# Altium PCB Epoxy.PcbDoc
Units mil, origin at the board's own origin, x right, y up, seen from the top; angles counter-clockwise.
Board outline 6000 x 4000 mil, 2 copper layers (Top Layer, Bottom Layer); 91 components, 74 nets, 328 pads, 6 vias.
Unrouted connection lines stored in the file: 208.
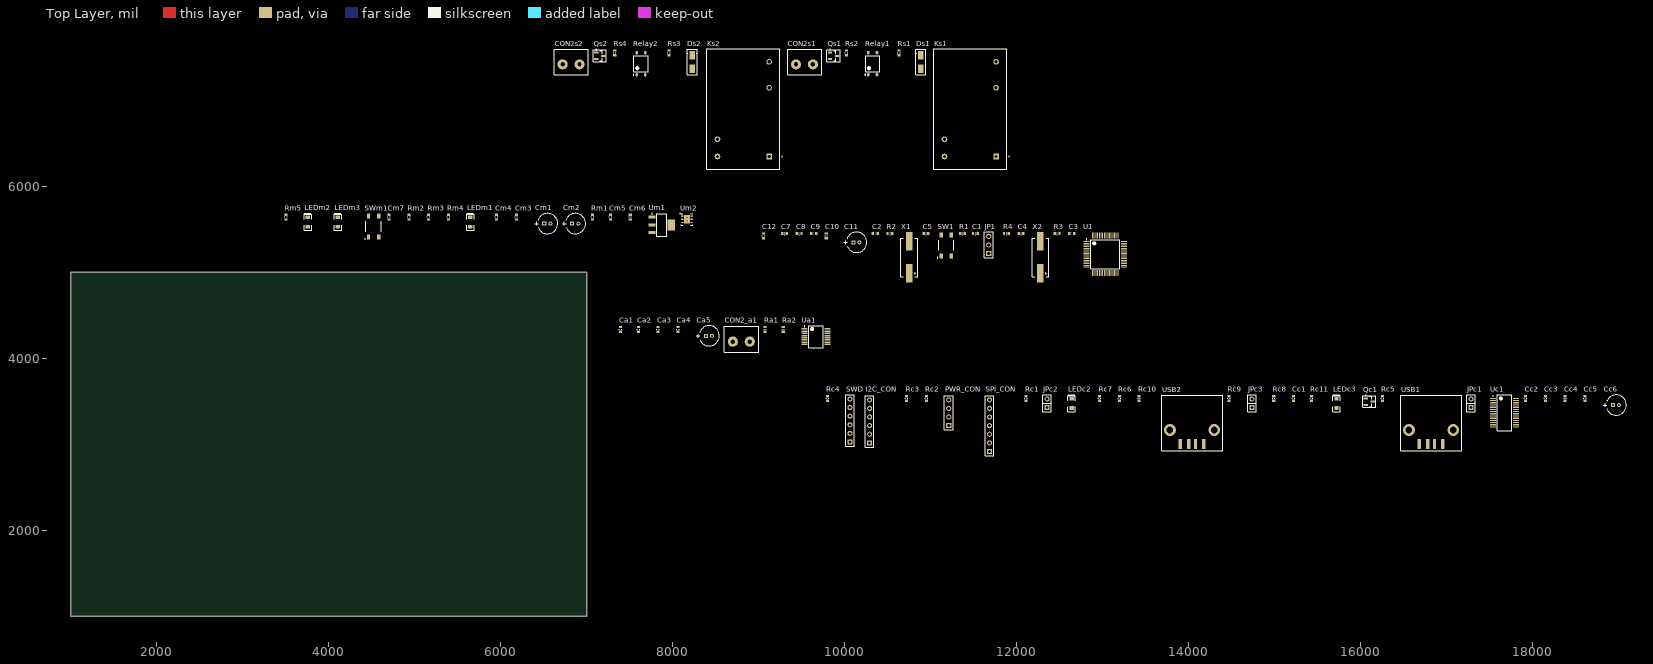
[diagram p0: Top Layer view]
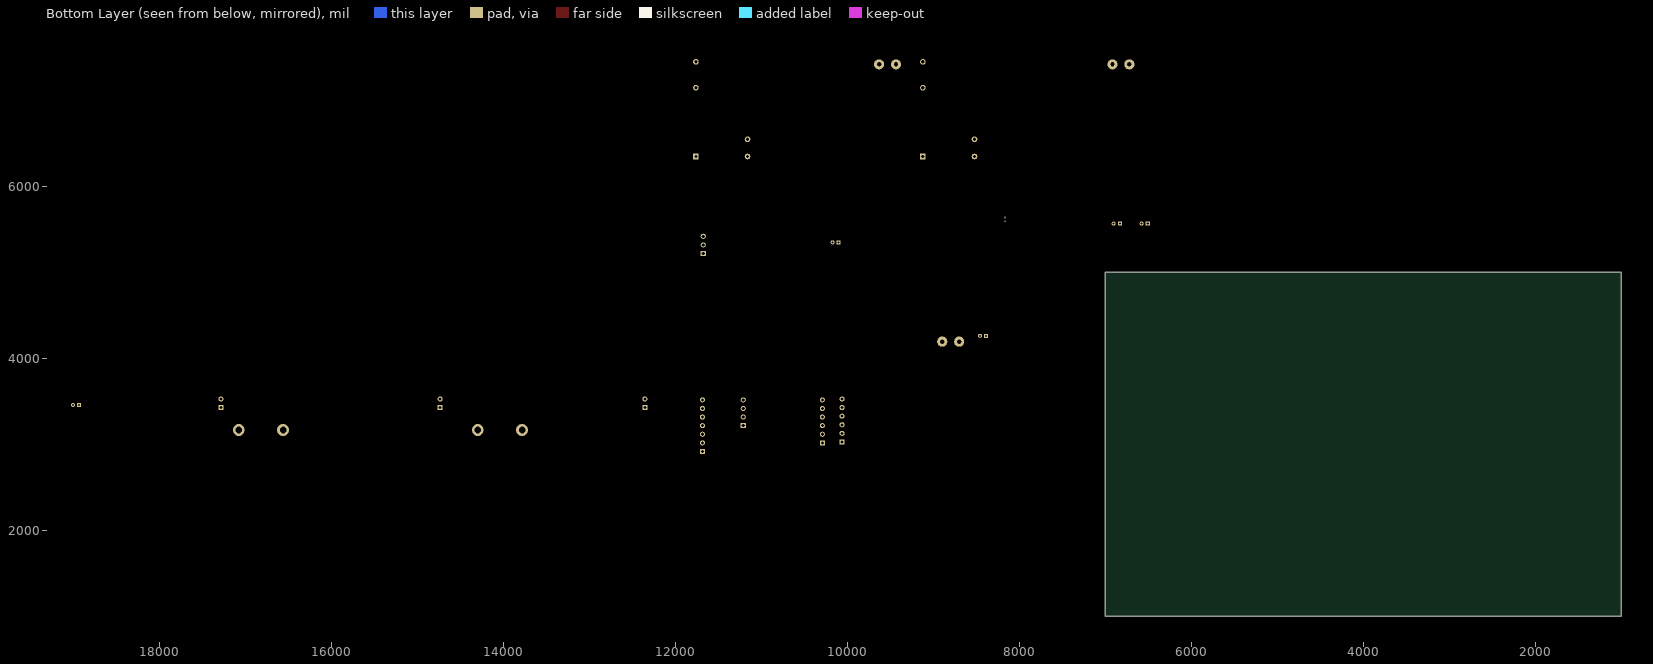
[diagram p1: Bottom Layer view, seen from below]

## Layer stack, top to bottom
Top Solder: solder mask 0.4, Solder Resist, Dk 3.5
Top Layer: signal copper 1.4
Dielectric 1: dielectric 12.6, FR-4, Dk 4.8
Bottom Layer: signal copper 1.4
Bottom Solder: solder mask 0.4, Solder Resist, Dk 3.5

## Board outline
1000,1000 7000,1000 7000,5000 1000,5000

## Design rules (kind name [scope] priority, off if disabled: settings)
Clearance [All] p1: gap=10 ignorepadtopadclearanceinfootprint=FALSE except(0: Arc-Hole Track-Hole SMDPad-Hole THPad-Hole Via-Hole Fill-Hole Poly-Hole Region-Hole Text-Hole)
PolygonConnect [All] p1: connectstyle=Relief reliefconductorwidth=10 reliefentries=4 polygonreliefangle="90 Angle" airgapwidth=10
RoomDefinition Scanners [InComponentClass('Scanners')] p1: confinementstyle=ConfineIn formatcopy=TRUE lockcomponents=FALSE outline 6605,6187.95 11930,6187.95 11930,7707.95 6605,7707.95
RoomDefinition Misc [InComponentClass('Misc')] p2: confinementstyle=ConfineIn formatcopy=TRUE lockcomponents=FALSE outline 3470,5367.56 8265,5367.56 8265,5797.56 3470,5797.56
RoomDefinition MCU [InComponentClass('MCU')] p3: confinementstyle=ConfineIn formatcopy=TRUE lockcomponents=FALSE outline 9025,4870 13300,4870 13300,5580 9025,5580
RoomDefinition Connectors [InComponentClass('Connectors')] p4: confinementstyle=ConfineIn formatcopy=TRUE lockcomponents=FALSE outline 9770,2857.56 19105,2857.56 19105,3687.56 9770,3687.56
RoomDefinition Analiser [InComponentClass('Analiser')] p5: confinementstyle=ConfineIn formatcopy=TRUE lockcomponents=FALSE outline 7360,4062.56 9845,4062.56 9845,4492.56 7360,4492.56
RoutingVias [All] p1: holewidth=28 width=50 viastyle="Through Hole" minholewidth=28 minwidth=50 maxholewidth=28 maxwidth=50
SolderMaskExpansion [All] p1: expansion=4
Width [All] p1: maxlimit=10 minlimit=10 preferedwidth=10
30 further rules are at their usual default settings.

## Classes and differential pairs
component class Scanners: CON2s1 CON2s2 Ds1 Ds2 Ks1 Ks2 Qs1 Qs2 Relay1 Relay2 Rs1 Rs2 Rs3 Rs4
component class Misc: Cm1 Cm2 Cm3 Cm4 Cm5 Cm6 Cm7 Dm1 LEDm1 LEDm2 LEDm3 Rm1 Rm2 Rm3 Rm4 Rm5 SWm1 Um1 Um2
component class MCU: C1 C2 C3 C4 C5 C7 C8 C9 C10 C11 C12 JP1 R1 R2 R3 R4 SW1 U1 X1 X2
component class Connectors: Cc1 Cc2 Cc3 Cc4 Cc5 Cc6 I2C_CON JPc1 JPc2 JPc3 LEDc2 LEDc3 PWR_CON Qc1 Rc1 Rc2 Rc3 Rc4 Rc5 Rc6 Rc7 Rc8 Rc9 Rc10 Rc11 SPI_CON SWD Uc1 USB1 USB2
component class Analiser: Ca1 Ca2 Ca3 Ca4 Ca5 CON2_a1 Ra1 Ra2 Ua1

## Components (designator, comment, footprint, x,y, rotation, side; value= is the part's Value field where it differs from the comment)
C1 "20p" CAPC0603(1608)100_L 11520,5450 r0 top
C2 "20p" CAPC0603(1608)100_L 10355,5450 r0 top
C3 "20p" CAPC0603(1608)100_L 12640,5450 r0 top
C4 "20p" CAPC0603(1608)100_L 12050,5450 r0 top
C5 "100n" CAPC0603(1608)100_L 10945,5450 r0 top
C7 "100n" CAPC0603(1608)100_L 9300,5450 r0 top
C8 "100n" CAPC0603(1608)100_L 9470,5450 r0 top
C9 "100n" CAPC0603(1608)100_L 9640,5450 r0 top
C10 "100n" CAPC0603(1608)100_L 9785,5425 r90 top
C11 "1uF" Cap_THT_5x11 10100,5350 r0 top
C12 "100n" CAPC0603(1608)100_L 9055,5425 r90 top
Ca1 "100n" CAPC0603(1608)100_L 7390,4337.56 r90 top
Ca2 "100n" CAPC0603(1608)100_L 7600,4337.56 r90 top
Ca3 "100n" CAPC0603(1608)100_L 7830,4337.56 r90 top
Ca4 "100n" CAPC0603(1608)100_L 8060,4337.56 r90 top
Ca5 "1uF" Cap_THT_5x11 8385,4262.56 r0 top
Cc1 "100n" CAPC0603(1608)100_L 15220,3532.56 r90 top
Cc2 "100n" CAPC0603(1608)100_L 17920,3532.56 r90 top
Cc3 "100n" CAPC0603(1608)100_L 18150,3532.56 r90 top
Cc4 "100n" CAPC0603(1608)100_L 18380,3532.56 r90 top
Cc5 "100n" CAPC0603(1608)100_L 18610,3532.56 r90 top
Cc6 "1uF" Cap_THT_5x11 18935,3457.56 r0 top
Cm1 "10uF" Cap_THT_5x11 6505,5567.56 r0 top
Cm2 "10uF" Cap_THT_5x11 6830,5567.56 r0 top
Cm3 "1uF" CAPC0603(1608)100_L 6180,5642.56 r90 top
Cm4 "100n" CAPC0603(1608)100_L 5950,5642.56 r90 top
Cm5 "1uF" CAPC0603(1608)100_L 7275,5642.56 r90 top
Cm6 "100n" CAPC0603(1608)100_L 7505,5642.56 r90 top
Cm7 "100n" CAPC0603(1608)100_L 4700,5642.56 r90 top
CON2_a1 "ARK2" ARK2 8600,4072.56 r0 top
CON2s1 "ARK2" ARK2 9335,7297.95 r0 top
CON2s2 "ARK2" ARK2 6620,7297.95 r0 top
Ds1 "D Schottky" SMA 10885,7447.95 r90 top
Ds2 "D Schottky" SMA 8225,7447.95 r90 top
I2C_CON "HDR1X6" HDR1X6 10290,3017.56 r90 top
JP1 "HDR1X3" HDR1X3 11675,5220 r90 top
JPc1 "Jumper" "HDR1X2 - JP" 17235,3477.56 r90 top
JPc2 "Jumper" "HDR1X2 - JP" 12305,3477.56 r90 top
JPc3 "Jumper" "HDR1X2 - JP" 14685,3477.56 r90 top
Ks1 "Relay-SPDT" MODULE5B 11460,6897.95 r90 top
Ks2 "Relay-SPDT" MODULE5B 8820,6897.95 r90 top
LEDc2 "RED" 0805_DIODE 12640,3417.56 r90 top
LEDc3 "RED" 0805_DIODE 15720,3417.56 r90 top
LEDm1 "RED" 0805_DIODE 5645,5527.56 r90 top
LEDm2 "RED" 0805_DIODE 3755,5527.56 r90 top
LEDm3 "RED" 0805_DIODE 4105,5527.56 r90 top
PWR_CON "HDR1X4" HDR1X4 11210,3217.56 r90 top
Qc1 "BC817-25" SOT23_N 16100,3497.56 r0 top
Qs1 "BC817-25" SOT23_N 9870,7517.95 r0 top
Qs2 "BC817-25" SOT23_N 7150,7517.95 r0 top
R1 "0R" RESC0603(1608)_L 11370,5450 r0 top
R2 "0R" RESC0603(1608)_L 10525,5450 r0 top
R3 "0R" RESC0603(1608)_L 12470,5450 r0 top
R4 "0R" RESC0603(1608)_L 11880,5450 r0 top
Ra1 "2k" RESC0603(1608)_L 9075,4337.56 r90 top
Ra2 "0k" RESC0603(1608)_L 9285,4337.56 r90 top
Rc1 "0R" RESC0603(1608)_L 12110,3532.56 r90 top value=0
Rc2 "0R" RESC0603(1608)_L 10950,3532.56 r90 top
Rc3 "0R" RESC0603(1608)_L 10720,3532.56 r90 top
Rc4 "0R" RESC0603(1608)_L 9800,3532.56 r90 top
Rc5 "10k" RESC0603(1608)_L 16255,3532.56 r90 top
Rc6 "22R" RESC0603(1608)_L 13195,3532.56 r90 top
Rc7 "22R" RESC0603(1608)_L 12965,3532.56 r90 top
Rc8 "1k5" RESC0603(1608)_L 14990,3532.56 r90 top
Rc9 "10k" RESC0603(1608)_L 14470,3532.56 r90 top
Rc10 "3k3" RESC0603(1608)_L 13425,3532.56 r90 top
Rc11 "3.3k" RESC0603(1608)_L 15430,3532.56 r90 top
Relay1 "FODM121R2" "FAIR-MFP 4L_V" 10325,7427.95 r90 top
Relay2 "FODM121R2" "FAIR-MFP 4L_V" 7630,7427.95 r90 top
Rm1 "3k3" RESC0603(1608)_L 7065,5642.56 r90 top
Rm2 "3k3" RESC0603(1608)_L 4930,5642.56 r90 top
Rm3 "3k3" RESC0603(1608)_L 5160,5642.56 r90 top
Rm4 "4k7" RESC0603(1608)_L 5390,5642.56 r90 top
Rm5 "100R" RESC0603(1608)_L 3500,5642.56 r90 top
Rs1 "RES0603" RESC0603(1608)_L 10630,7552.95 r90 top
Rs2 "RES0603" RESC0603(1608)_L 10020,7552.95 r90 top
Rs3 "RES0603" RESC0603(1608)_L 7955,7552.95 r90 top
Rs4 "RES0603" RESC0603(1608)_L 7325,7552.95 r90 top
SPI_CON "HDR1X7" HDR1X7 11685,2917.56 r90 top
SW1 "TVCM01-038B" JNFU-TVCM01-038B_V 11180,5315 r90 top
SWD "HDR1X6" HDR1X6 10060,3027.56 r90 top
SWm1 "TVCM01-038B" JNFU-TVCM01-038B_V 4520,5532.56 r90 top
U1 "STM32F103RBT6TR" LQFP64_N 13030,5210 r0 top
Ua1 "AD5933YRSZ" ADI-RS-16_L 9665,4252.56 r0 top
Uc1 "FT232RL-Reel" SSOP-28_L 17675,3367.56 r0 top
Um1 "LD1117S50TR" SOT-223_L 7870,5552.56 r0 top
Um2 "LD39050PU33R" DFN6D_L 8165,5617.56 r0 top
USB1 "USB_A" USB_A_SMT 16820,3002.56 r0 top
USB2 "USB_A" USB_A_SMT 14040,3002.56 r0 top
X1 "8MHz" HC49/4H_SMX 10750,5175 r90 top
X2 "8MHz" HC49/4H_SMX 12275,5175 r90 top

## Footprints (in the part's own frame and the unit in brackets; to place one, negate y for a bottom-side part, rotate by r counter-clockwise, add the part's x,y. Pads: shape width x height; smd on the part's side, far side on the other; paste and mask are expansions set on the pad)
0805_DIODE [mm]
  rect 1.05x1.3 smd: 1(0.127,0) 2(2.858,0)
  silkscreen extent -0.98,-1.12 4.09,1.12, body extent 0.41,-0.64 2.43,0.64, height 0.81
ADI-RS-16_L [mm] "SOP, 16-Leads, Body 6.2x5.3mm, Pitch 0.65mm, IPC High Density"
  oval 1.8x0.45 smd: 1(-3.4,2.275) 2(-3.4,1.625) 3(-3.4,0.975) 4(-3.4,0.325) 5(-3.4,-0.325) 6(-3.4,-0.975) 7(-3.4,-1.625) 8(-3.4,-2.275) 9(3.4,-2.275) 10(3.4,-1.625) 11(3.4,-0.975) 12(3.4,-0.325) 13(3.4,0.325) 14(3.4,0.975) 15(3.4,1.625) 16(3.4,2.275)
  silkscreen extent -3.52,-3.25 2.1,3.25, body extent -2.8,-3.25 2.8,3.25, height 2
ARK2 [mm]
  round 3 hole 1.3: 1(2.5,3.1) 2(7.5,3.1)
  silkscreen extent 0,0 10.1,7.6, body extent 0,0 10,7.6, height 10
Cap_THT_5x11 [mm] "Cap_THT_5x11"
  rect 1.2x1.2 hole 0.6: 1(0,0)
  round 1.2 hole 0.6: 2(1.8,0)
  silkscreen extent -2.79,-3 3.97,3, body extent -1.59,-2.49 3.4,2.5, height 11.5
CAPC0603(1608)100_L [mm]
  rect 0.7x0.9 smd: 1(-0.7,0) 2(0.7,0)
  silkscreen extent -0.05,-0.35 0.05,0.35, body extent -0.87,-0.47 0.88,0.48, height 1
DFN6D_L [mm] "SON, 6-Leads, Body 3x3mm, Pitch 0.95mm, Thermal Pad 2.4x1.65mm, IPC High Density"
  oval 0.7x0.4 smd: 1(-1.425,0.95) 2(-1.425,0) 3(-1.425,-0.95) 4(1.425,-0.95) 5(1.425,0) 6(1.425,0.95)
  rect 1.65x2.4 smd: 7(0,0)
  silkscreen extent -2.15,-1.7 1.7,1.75, body extent -1.55,-1.55 1.55,1.55, height 0.95
"FAIR-MFP 4L_V" [mm] "SOP, 4-Leads, Body 4.2x4.6mm, Pitch 2.54mm"
  oval 1x0.8 smd: 1(-3.25,1.27) 2(-3.25,-1.27) 3(3.25,-1.27) 4(3.25,1.27)
  silkscreen extent -3.37,-2.1 2.35,2.34, body extent -3.39,-1.92 3.39,1.93, height 2.4
HC49/4H_SMX [mm]
  rect 5.5x2 smd: 1(-4.75,0) 2(4.75,0)
  silkscreen extent -5.7,-2.45 5.7,2.45, body extent -6.3,-2.3 6.2,2.35, height 3.9
"HDR1X2 - JP" [mm] "Connector; Header; 2 Position, Jumper"
  rect 1.5x1.5 hole 0.9: 1(-1.27,-1.27)
  round 1.5 hole 0.9: 2(1.27,-1.27)
  silkscreen extent -2.54,-2.54 2.54,0, body extent -2.54,-2.51 2.54,0.03, height 8.54
HDR1X3 [mm] "Connector; Header; 3 Position"
  rect 1.5x1.5 hole 0.9: 1(0,0)
  round 1.5 hole 0.9: 2(2.54,0) 3(5.08,0)
  silkscreen extent -1.27,-1.27 6.35,1.27, body extent -1.27,-1.24 6.35,1.3, height 8.54
HDR1X4 [mm] "Connector; Header; 4 Position"
  rect 1.5x1.5 hole 0.9: 1(0,0)
  round 1.5 hole 0.9: 2(2.54,0) 3(5.08,0) 4(7.62,0)
  silkscreen extent -1.27,-1.27 8.89,1.27, body extent -1.27,-1.27 8.89,1.27, height 8.54
HDR1X6 [mm] "Connector; Header; 6 Position"
  rect 1.5x1.5 hole 0.9: 1(0,0)
  round 1.5 hole 0.9: 2(2.54,0) 3(5.08,0) 4(7.62,0) 5(10.16,0) 6(12.7,0)
  silkscreen extent -1.27,-1.27 13.97,1.27, body extent -1.27,-1.27 13.97,1.27, height 8.54
HDR1X7 [mm] "Connector; Header; 7 Position"
  rect 1.5x1.5 hole 0.9: 1(0,0)
  round 1.5 hole 0.9: 2(2.54,0) 3(5.08,0) 4(7.62,0) 5(10.16,0) 6(12.7,0) 7(15.24,0)
  silkscreen extent -1.27,-1.27 16.51,1.27, body extent -1.27,-1.24 16.51,1.3, height 8.54
JNFU-TVCM01-038B_V [mm] "Surface Mount Switch, 4.5 x 4.5 mm Body"
  rect 1.5x1 smd: 1(-3.1,1.5) 2(3.1,1.5) 3(-3.1,-1.5) 4(3.1,-1.5)
  silkscreen extent -3.77,-2.25 1.52,2.67, body extent -2.25,-2.25 2.25,2.25, height 3.8
LQFP64_N [mm] "Thin QFP, 64-Leads, Body 10x10mm, Pitch 0.5mm, IPC Medium Density"
  oval 1.8x0.3 smd: 1(-5.55,3.75) 2(-5.55,3.25) 3(-5.55,2.75) 4(-5.55,2.25) 5(-5.55,1.75) 6(-5.55,1.25) 7(-5.55,0.75) 8(-5.55,0.25) 9(-5.55,-0.25) 10(-5.55,-0.75) 11(-5.55,-1.25) 12(-5.55,-1.75) 13(-5.55,-2.25) 14(-5.55,-2.75) 15(-5.55,-3.25) 16(-5.55,-3.75) 33(5.55,-3.75) 34(5.55,-3.25) 35(5.55,-2.75) 36(5.55,-2.25) 37(5.55,-1.75) 38(5.55,-1.25) 39(5.55,-0.75) 40(5.55,-0.25) 41(5.55,0.25) 42(5.55,0.75) 43(5.55,1.25) 44(5.55,1.75) 45(5.55,2.25) 46(5.55,2.75) 47(5.55,3.25) 48(5.55,3.75)
  oval 0.3x1.8 smd: 17(-3.75,-5.55) 18(-3.25,-5.55) 19(-2.75,-5.55) 20(-2.25,-5.55) 21(-1.75,-5.55) 22(-1.25,-5.55) 23(-0.75,-5.55) 24(-0.25,-5.55) 25(0.25,-5.55) 26(0.75,-5.55) 27(1.25,-5.55) 28(1.75,-5.55) 29(2.25,-5.55) 30(2.75,-5.55) 31(3.25,-5.55) 32(3.75,-5.55) 49(3.75,5.55) 50(3.25,5.55) 51(2.75,5.55) 52(2.25,5.55) 53(1.75,5.55) 54(1.25,5.55) 55(0.75,5.55) 56(0.25,5.55) 57(-0.25,5.55) 58(-0.75,5.55) 59(-1.25,5.55) 60(-1.75,5.55) 61(-2.25,5.55) 62(-2.75,5.55) 63(-3.25,5.55) 64(-3.75,5.55)
  silkscreen extent -5.67,-4.25 4.25,4.57, body extent -5,-5 5,5, height 1.6
MODULE5B [mm] "DIP; 5 Round Pins; Row Space 15.24 mm; Pitch 2.54 mm"
  rect 1.65x1.65 hole 1: 1(-13.97,-7.62)
  round 1.65 hole 1: 2(-13.97,7.62) 3(-8.89,7.62) 4(13.97,-7.62) 5(6.35,-7.62)
  silkscreen extent -17.8,-11.58 17.8,10.8, body extent -17.8,-10.8 17.8,10.8, height 14
RESC0603(1608)_L [mm]
  rect 0.7x0.9 smd: 1(-0.7,0) 2(0.7,0)
  silkscreen extent -0.05,-0.35 0.05,0.35, body extent -0.85,-0.47 0.85,0.47, height 0.6
SMA [mm] "Molded Diode, 2-Leads, Body 4,3x2,7mm, IPC Medium Density"
  rect 2.5x1.7 smd: 1(-2,0) 2(2,0)
  silkscreen extent -3.75,-1.5 3.75,1.5, body extent -2.6,-1.4 2.6,1.4, height 2.21
SOT23_N [mm]
  rect 1.3x0.6 smd: 1(-1.05,0.95) 2(-1.05,-0.95) 3(1.05,0)
  silkscreen extent -1.95,-1.75 1.95,1.92, body extent -1.6,-1.5 1.6,1.5, height 1.1
SOT-223_L [mm] "SOT223, 4-Leads, Body 6.5x3.5mm, Pitch 2.3mm, Lead Span 7mm, IPC High Density"
  rect 2.1x0.9 smd: 1(-2.85,2.3) 2(-2.85,0) 3(-2.85,-2.3)
  rect 2.1x3.2 smd: 4(2.85,0)
  silkscreen extent -2.97,-3.35 1.5,3.42, body extent -1.85,-3.35 1.85,3.35, height 1.8
SSOP-28_L [mm] "SOP, 28-Leads, Body 10.2x5.3mm, Pitch 0.65mm, IPC High Density"
  oval 1.8x0.35 smd: 1(-3.4,4.225) 2(-3.4,3.575) 3(-3.4,2.925) 4(-3.4,2.275) 5(-3.4,1.625) 6(-3.4,0.975) 7(-3.4,0.325) 8(-3.4,-0.325) 9(-3.4,-0.975) 10(-3.4,-1.625) 11(-3.4,-2.275) 12(-3.4,-2.925) 13(-3.4,-3.575) 14(-3.4,-4.225) 15(3.4,-4.225) 16(3.4,-3.575) 17(3.4,-2.925) 18(3.4,-2.275) 19(3.4,-1.625) 20(3.4,-0.975) 21(3.4,-0.325) 22(3.4,0.325) 23(3.4,0.975) 24(3.4,1.625) 25(3.4,2.275) 26(3.4,2.925) 27(3.4,3.575) 28(3.4,4.225)
  silkscreen extent -3.52,-5.25 2.1,5.25, body extent -2.8,-5.25 2.8,5.25, height 2
USB_A_SMT [mm]
  rect 1x3 smd: 1(3.5,0) 2(1,0) 3(-1,0) 4(-3.5,0)
  silkscreen extent -9,-2 9,14.5, body extent -8.67,-1.75 8.67,14.25, height 6.81

## Part data
C1 C2 C3 C4 C5 C7 C8 C9 C10 C12 Ca1 Ca2 Ca3 Ca4 Cc1 Cc2 Cc3 Cc4 Cc5 Cm3 Cm4 Cm5 Cm6 Cm7: library part CMP-1590-00005-1, "0603 (1608 Metric) Chip Capacitor", Case-EIA=0603, Case-Metric=1608, PackageReference=CAPC0603(1608)100
C11 Ca5 Cc6 Cm1 Cm2: library part Cap_Pol, "Polar capacitor"
CON2_a1 CON2s1 CON2s2: "Z彻cze 渞ubowe 2 piny"
Ds1 Ds2: "Schottky Diode", Code_JEDEC=DO-214-AA, LatestRevisionDate=17-Jul-2002, LatestRevisionNote="Re-released for DXP Platform.", PackageDescription="DO-214-AA/SMB; 2 C-Bend Leads; Body 5.3 x 3.6 mm, inc. leads (LxW)", PackageReference=SMB, Published=8-Jun-2000, Publisher="Altium Limited"
I2C_CON SWD: "Header, 6-Pin", LatestRevisionDate=17-Jul-2002, LatestRevisionNote="Re-released for DXP Platform.", Publisher="Altium Limited"
JP1: "Header, 3-Pin", LatestRevisionDate=17-Jul-2002, LatestRevisionNote="Re-released for DXP Platform.", Publisher="Altium Limited"
JPc1 JPc2 JPc3: library part Jumper_2, "Jumper, 2-Pin"
Ks1 Ks2: "Single-Pole Dual-Throw Relay", LatestRevisionDate=17-Jul-2002, LatestRevisionNote="Re-released for DXP Platform.", PackageReference=MODULE5B, Published=24-Mar-1999, Publisher="Altium Limited"
LEDc2 LEDc3 LEDm1 LEDm2 LEDm3: library part LED, "Light-emitting diode", COLOR=RED
PWR_CON: "Header, 4-Pin", LatestRevisionDate=17-Jul-2002, LatestRevisionNote="Re-released for DXP Platform.", Publisher="Altium Limited"
Qc1 Qs1 Qs2: "NPN General-purpose Transistor", ComponentLink1Description="Manufacturer Link", ComponentLink1URL=http://www.semiconductors.philips.com/, ComponentLink2Description=Datasheet, ComponentLink2URL=http://www.semiconductors.philips.com/acrobat/datasheets/BC817_BC817W_BC337_5.pdf, DatasheetVersion=Jun-1999, LatestRevisionDate=12-Dec-2006, LatestRevisionNote="IPC-7351 Footprint Added.", PackageDescription="3-Pin SOT-23 Package 0.95 mm Pitch, 2.3 mm Lead Span", PackageReference=SOT23, PackageVersion=May-1999, Published=17-Sep-2003, Publisher="Altium Limited"
R1 R2 R3 R4 Ra1 Ra2 Rc1 Rc2 Rc3 Rc4 Rc5 Rc6 Rc7 Rc8 Rc9 Rc10 Rc11 Rm1 Rm2 Rm3 Rm4 Rm5 Rs1 Rs2 Rs3 Rs4: library part CMP-1591-00001-1, "0603 (1608 Metric) Chip Resistor", Case-EIA=0603, Case-Metric=1608, PackageReference=RESC0603(1608)
Relay1 Relay2: library part CMP-1569-00003-1, "Transistor Output Optocoupler, 1 to 1.3 V, -40 to 110 degC, 4-Pin SOP (MFP 4L), RoHS, Tape and Reel", Forward Voltage Max="1.3 V", Forward Voltage Min="1 V", PartNumber=FODM121, Temperature Max="110 degC", Temperature Min="-40 degC", ComponentLink1Description="Manufacturer URL", ComponentLink1URL=https://www.fairchildsemi.com/, ComponentLink2Description=Datasheet, ComponentLink2URL=https://www.fairchildsemi.com/datasheets/FO/FODM121.pdf, ComponentLink3Description="Package Specification", ComponentLink3URL=https://www.fairchildsemi.com/package-drawings/MF/MFP04C.pdf, DatasheetVersion="Rev. 1.1.4", Mounting Technology="Surface Mount", PackageDescription="4-Pin Mini Flat Package, Body 3.85 x 4.4 mm, Pitch 2.54 mm", Packing="Tape and Reel", RoHS=TRUE, VCE Saturation Max="0.4 V"
SPI_CON: "Header, 7-Pin", LatestRevisionDate=17-Jul-2002, LatestRevisionNote="Re-released for DXP Platform.", Publisher="Altium Limited"
SW1 SWm1: library part CMP-0224-00001-1, "Switch, Push Button, 50 mA, 12V DC, SMD", Case Size="4.5 x 4.5", Operating Temperature="-30 to 85 degC", ComponentLink1Description="Manufacturer URL", ComponentLink1URL=http://www.jian-fu.com/, ComponentLink2Description=Datasheet, ComponentLink2URL=http://www.jian-fu.com/product-61.html, Mechanical Life="100,000 cycles", Mounting Technology="Suface Mount", PackageDescription="4-Pin Surface Mount Switch, 4.5 x 4.5 mm Body", PackageReference=TVCM01-038B, PartNumber=TVCM01-038B
U1: library part CMP-0237-00169-1, "STM32 ARM-based 32-bit MCU Performance Line with 128 kB Flash, 20 kB Internal RAM, -40 to +85癈 Temperature, 64-Pin LQFP, Tape and Reel", ComponentLink1Description="STM32F103 Datasheet", ComponentLink1URL=http://www.st.com/internet/com/TECHNICAL_RESOURCES/TECHNICAL_LITERATURE/DATASHEET/CD00161566.pdf, ComponentLink2Description="STM32 Family Web Page", ComponentLink2URL=www.st.com/stm32, ComponentLink3Description="st.com Home", ComponentLink3URL=http://www.st.com/internet/com/home/home.jsp, DatasheetVersion="rev13.0, Apr-2011", PackageDescription="64-Pin Low-Profile Quad Flat Pack, 10 x 10 mm Body, 0.5 mm Pitch (LQFP64)", PackageReference=LQFP64, PackageVersion="rev13, Apr-2011", PartId=1
Ua1: library part CMP-0293-00046-1, "1 MSPS, 12-Bit Impedance Converter, Network Analyzer, Serial, RS-16, 77 Tube, Pb-Free", Code_JEDEC=MO-150-AC, ComponentLink1Description="Manufacturer URL", ComponentLink1URL=www.analog.com, ComponentLink2Description=Datasheet, ComponentLink2URL=http://www.analog.com/static/imported-files/data_sheets/AD5933.pdf, ComponentLink3Description="Package Specification", ComponentLink3URL=http://www.analog.com/static/imported-files/packages/31572257652246RS_16.pdf, DatasheetVersion="Rev. D", I/O Interface=Serial, I Supply total (max)=15mA, Master fclk=16.776MHz, PackageDescription="16-Lead Shrink Small Outline Package [SSOP]", PackageReference=RS-16, PackageVersion=3/17/2005, Resolution (Bits)=12bit, Tuning Word Width (bits)=27bit
Uc1: library part CMP-0078-00029-3, "USB UART Asynchronous Serial Data Transfer Chip, 28-pin SSOP, Tape and Reel", Manufacturer=FTDI, ComponentLink1Description="Manufacturer URL", ComponentLink1URL=http://www.ftdichip.com/, ComponentLink2Description=Datasheet, ComponentLink2URL=http://www.ftdichip.com/Support/Documents/DataSheets/ICs/DS_FT232R.pdf, DatasheetVersion="ver 2.10, Mar-2012", PackageDescription="28-Pin Small Outline Package 0.65 mm Pitch", PackageReference=SSOP-28, PackageVersion=Mar-12, PartNumber=FT232RL-Reel, RevisionNote="DatasheetVersion updated to 2.10 Mar-2012"
Um1: library part CMP-0244-00312-1, "Fixed Low Drop Positive Voltage Regulator, 5V, 4-Pin SOT-223, Tape and Reel", ComponentLink1Description="Manufacturer URL", ComponentLink1URL=http://www.st.com, ComponentLink2Description=Datasheet, ComponentLink2URL=http://www.st.com/internet/com/TECHNICAL_RESOURCES/TECHNICAL_LITERATURE/DATASHEET/CD00000544.pdf, DatasheetVersion=1/11/2011, PackageDescription="4-Pin SOT-223 Package, 6.5 x 3.5 mm Body, 2.3 mm Pitch, 7 mm Lead Span", PackageReference=SOT-223, PackageVersion=2010
Um2: library part CMP-0244-00288-1, "500 mA Low Quiescent Current Low Noise Voltage Regulator, 3.3V, 6-Pin VDFDPN, Tape and Reel", ComponentLink1Description="Manufacturer URL", ComponentLink1URL=http://www.st.com, ComponentLink2Description=Datasheet, ComponentLink2URL=http://www.st.com/internet/com/TECHNICAL_RESOURCES/TECHNICAL_LITERATURE/DATASHEET/CD00227527.pdf, DatasheetVersion=1/03/2009, PackageDescription="6-Pin Plastic, Dual LLP, 3 x 3 mm Body, 0.95 mm Pitch, Exposed Pad", PackageReference=DFN6D, PackageVersion=2008
USB1 USB2: "USB A SMT Socket"
X1 X2: library part XTAL, "Oscillator"

## Via types
v1: diameter 137.8, hole 78.74, Top Layer to Bottom Layer, 4 vias
v2: diameter 19.68, hole 7.87, Top Layer to Bottom Layer, 2 vias

## Nets (pads, with @x,y where several pads share a name; then routed paths per layer and width w, separated by ;. In a path a pad name is that pad's centre, name@x,y a point inside that pad or via, vN(x,y) a via of type N, cw(c..) or ccw(c..) an arc to the next point about the centre after c; other vN are vias at no path point)
3.3V: C7.2 C8.2 C9.2 C10.2 C11.1 C12.2 Cm5.2 Cm6.2 I2C_CON.6 JP1.1 PWR_CON.3 Qc1.3 Rc5.2 Rm4.2 SPI_CON.7 U1.1 U1.13 U1.19 U1.32 U1.48 U1.64 Um2.4
5V: Ca1.2 Ca2.2 Ca3.2 Ca4.2 Ca5.1 Cc2.2 Cc3.2 Cc4.2 Cc5.2 Cc6.1 Cm3.2 Cm4.2 Ds1.2 Ds2.2 Ks1.4 Ks2.4 PWR_CON.4 Rc9.1 Relay1.4 Relay2.4 Rm1.2 Rs1.2 Rs3.2 Ua1.9 Ua1.10 Ua1.11 Uc1.4 Uc1.20 Um2.1 Um2.6
AnaliserIN: Ks1.1 Ks2.1 Ra1.1 Ua1.5
AnaliserOUT: CON2_a1.1 Ua1.6
CS1: SPI_CON.5 U1.20
CS2: SPI_CON.6 U1.41
GND: C1.1 C2.1 C3.1 C4.1 C5.2 C7.1 C8.1 C9.1 C10.1 C11.2 C12.1 Ca1.1 Ca2.1 Ca3.1 Ca4.1 Ca5.2 Cc1.1 Cc2.1 Cc3.1 Cc4.1 Cc5.1 Cc6.2 Cm1.2 Cm2.2 Cm3.1 Cm4.1 Cm5.1 Cm6.1 CON2_a1.2 CON2s1.2 CON2s2.2 I2C_CON.1 JP1.3 LEDc2.2 LEDc3.2 LEDm1.2 LEDm2.2 LEDm3.2 PWR_CON.1 PWR_CON.2 Qs1.2 Qs2.2 Rm5.1 SPI_CON.1 SW1.3 SW1.4 SWD.3 SWm1.3 SWm1.4 U1.12 U1.18 U1.31 U1.47 U1.63 Ua1.12 Ua1.13 Ua1.14 Uc1.7 Uc1.18 Uc1.21 Uc1.25 Uc1.26 Um1.1 Um2.2 USB1.4 USB2.4
MCLK: C3.2 R3.1 Ua1.8 X2.1
MISO: SPI_CON.3 U1.22
MOSI: SPI_CON.2 U1.23
NetC1_2: C1.2 R1.1 X1.2
NetC2_2: C2.2 R2.1 X1.1
NetC4_2: C4.2 R4.1 X2.2
NetCc1_2: Cc1.2 Uc1.17
NetCm2_1: Cm2.1 Um1.2 Um1.4
NetCm7_1: Cm7.1 Rm5.2
NetCON2s1_1: CON2s1.1 Ks1.3
NetCON2s2_1: CON2s2.1 Ks2.3
NetDs1_1: Ds1.1 Ks1.5 Qs1.3
NetDs2_1: Ds2.1 Ks2.5 Qs2.3
NetJP1_2: JP1.2 U1.60
NetJPc1_1: JPc1.1 USB1.1
NetJPc2_1: JPc2.1 SWD.6
NetJPc3_1: JPc3.1 USB2.1
NetLEDc2_1: LEDc2.1 Rc10.1
NetLEDc3_1: LEDc3.1 Rc11.1
NetLEDm1_1: LEDm1.1 Rm1.1
NetLEDm2_1: LEDm2.1 Rm2.1
NetLEDm3_1: LEDm3.1 Rm3.1
NetQc1_2: Qc1.2 Rc8.2 Rc11.2
NetQs1_1: Qs1.1 Rs2.2
NetQs2_1: Qs2.1 Rs4.2
NetR1_2: R1.2 U1.3
NetR2_2: R2.2 U1.4
NetR3_2: R3.2 U1.5
NetR4_2: R4.2 U1.6
NetRa1_2: Ra1.2 Ra2.1
NetRa2_2: Ra2.2 Ua1.4
NetRc1_1: Rc1.1 SWD.5
NetRc2_1: Rc2.1 SWD.4
NetRc3_1: Rc3.1 SWD.2
NetRc4_1: Rc4.1 SWD.1
NetRc6_1: Rc6.1 USB2.2
NetRc7_1: Rc7.1 Rc8.1 USB2.3
NetRc9_2: Rc9.2 Uc1.14
NetRc10_2: Rc10.2 Uc1.23
NetRelay1_1: Relay1.1 Rs1.1
NetRelay1_3: Relay1.3 Rs2.1
NetRelay2_1: Relay2.1 Rs3.1
NetRelay2_3: Relay2.3 Rs4.1
NetUc1_15: Uc1.15 USB1.3
NetUc1_16: Uc1.16 USB1.2
NRST: C5.1 Rc2.2 SW1.1 SW1.2 U1.7
PB2: Cm7.2 Rm4.1 SWm1.1 SWm1.2 U1.28
PB8: I2C_CON.4 U1.61
PB9: I2C_CON.5 U1.62
PB14: Rm2.2 U1.35
PB15: Rm3.2 U1.36
PC0: Relay1.2 U1.8
PC1: Relay2.2 U1.9
SCK: SPI_CON.4 U1.21
SCL: U1.58 Ua1.16
SCL2: I2C_CON.3 U1.29
SDA: U1.59 Ua1.15
SDA2: I2C_CON.2 U1.30
SWO: Rc1.2 U1.55
TCK: Rc4.2 U1.49
TMS: Rc3.2 U1.46
UART_RX: U1.43 Uc1.5
UART_TX: U1.42 Uc1.1
USB_DM: Rc6.2 U1.44
USB_DP: Rc7.2 U1.45
USB_EN: Qc1.1 Rc5.1 U1.50
Vin: Cm1.1 JPc1.2 JPc2.2 JPc3.2 Um1.3
pads on no net: Ks1.2 Ks2.2 U1.2 U1.10 U1.11 U1.14 U1.15 U1.16 U1.17 U1.24 U1.25 U1.26 U1.27 U1.33 U1.34 U1.37 U1.38 U1.39 U1.40 U1.51 U1.52 U1.53 U1.54 U1.56 U1.57 Ua1.1 Ua1.2 Ua1.3 Ua1.7 Uc1.2 Uc1.3 Uc1.6 Uc1.8 Uc1.9 Uc1.10 Uc1.11 Uc1.12 Uc1.13 Uc1.19 Uc1.22 Uc1.24 Uc1.27 Uc1.28 Um2.3 Um2.5 Um2.7
copper on no net:
  other v1: 13781.34,3167.91 14298.66,3167.91 16561.34,3167.91 17078.66,3167.91
  other v2: 8165,5595.91 8165,5639.21